# Altium PCB GD32F150C8_CoreBoard.PcbDoc
Units mil, origin at the board's own origin, x right, y up, seen from the top; angles counter-clockwise.
Board outline 825 x 2570 mil, 2 copper layers (Top Layer, Bottom Layer); 35 components, 56 nets, 181 pads, 67 vias.
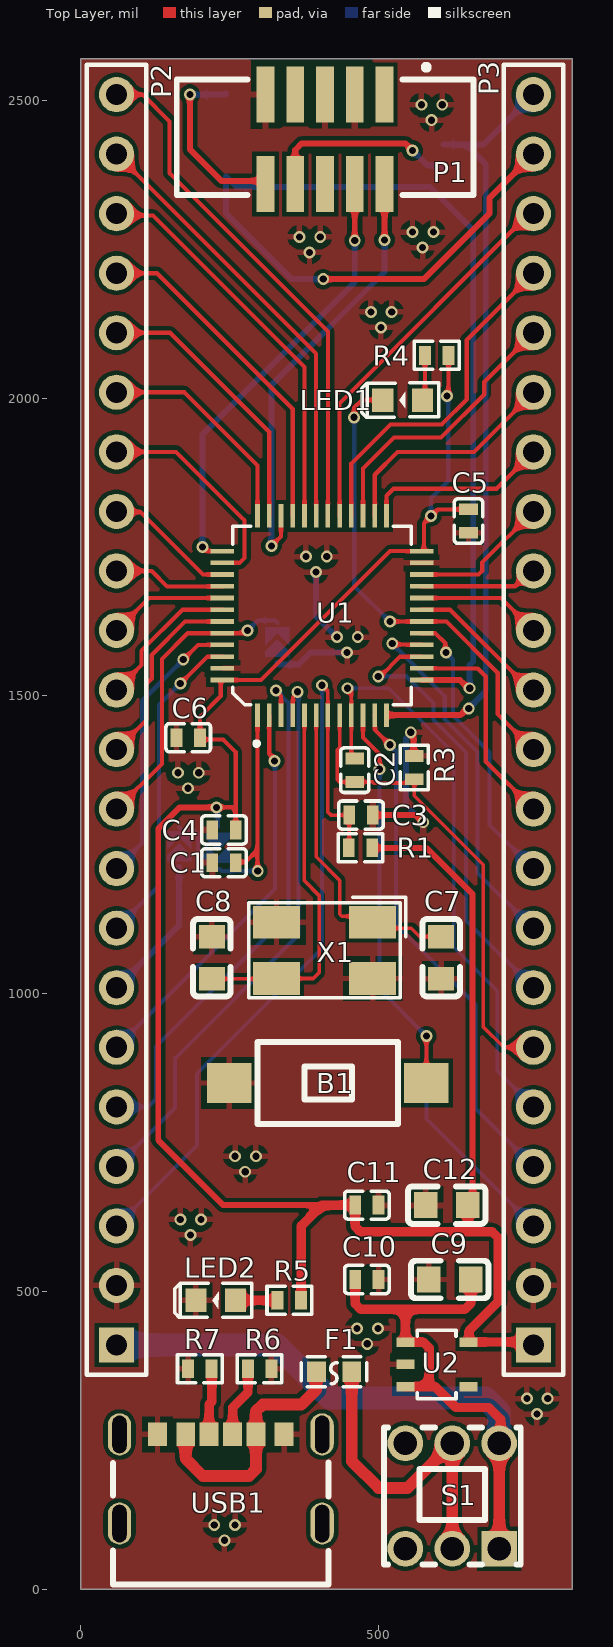
[diagram p0: Top Layer view]
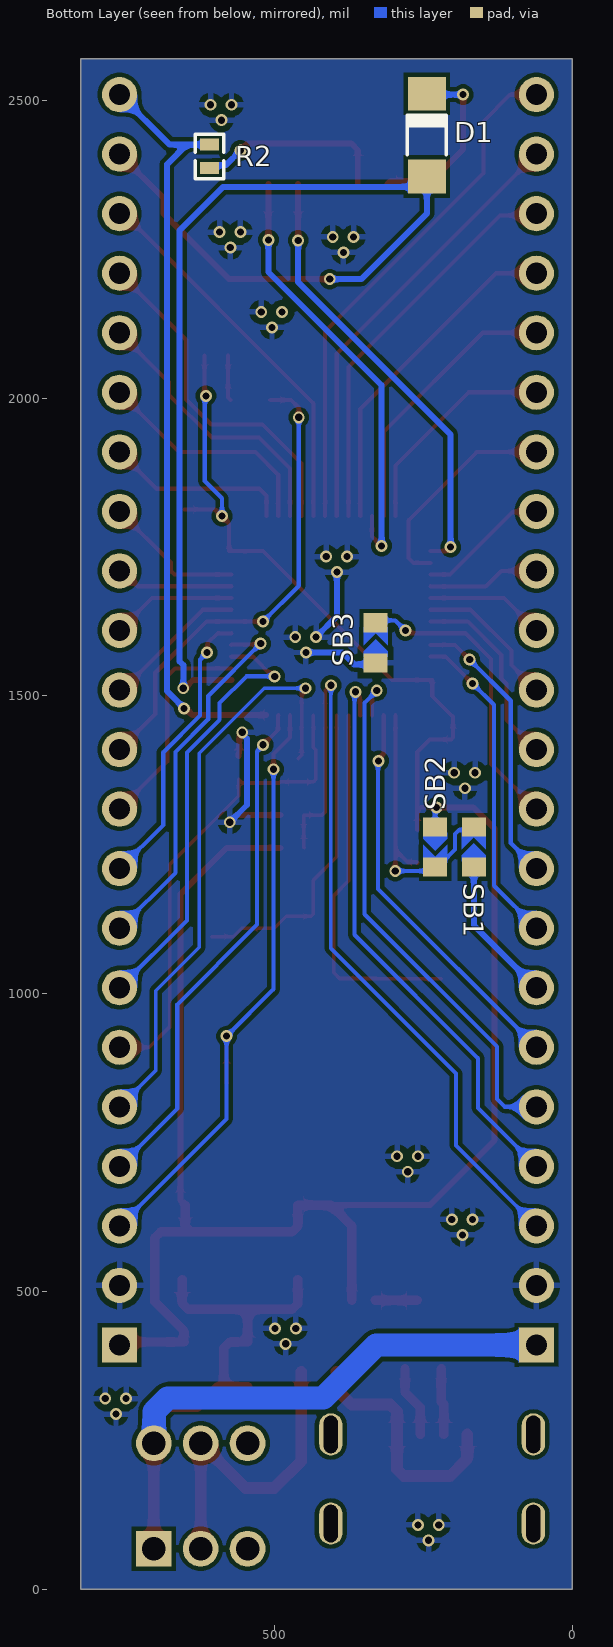
[diagram p1: Bottom Layer view, seen from below]
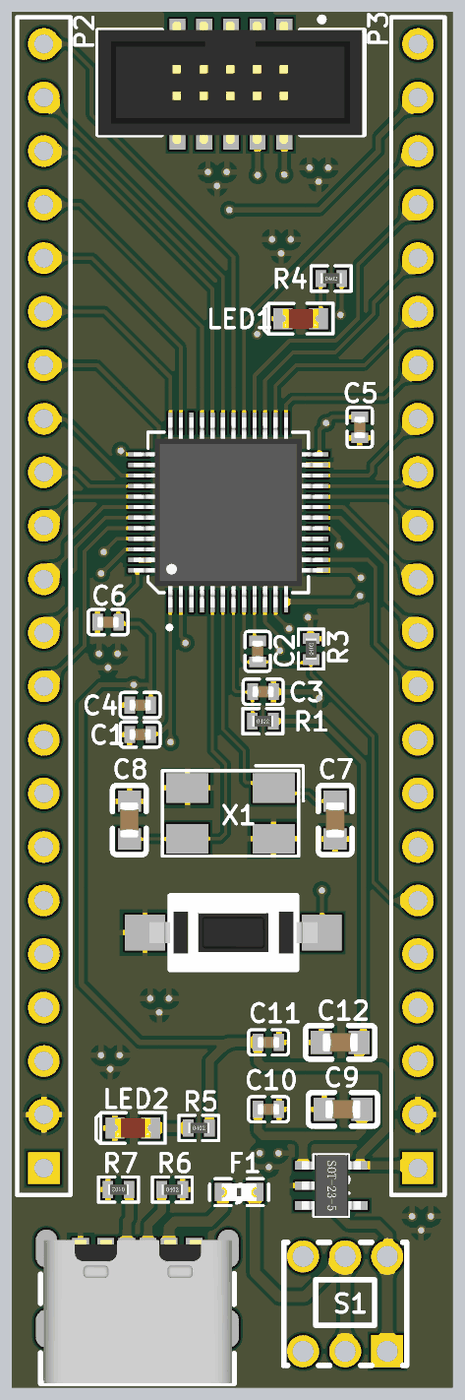
[diagram p2: 3D render of the assembled board from above, using the file's embedded part models]

## Layer stack, top to bottom
Top Solder: solder mask 0.4, Solder Resist, Dk 3.5
Top Layer: signal copper 1.4
Dielectric 1: dielectric 12.6, FR-4, Dk 4.8
Bottom Layer: signal copper 1.4
Bottom Solder: solder mask 0.4, Solder Resist, Dk 3.5

## Board outline
0,0 0,2570 825,2570 825,0

## Design rules (kind name [scope] priority, off if disabled: settings)
Clearance [All] p1: gap=7 ignorepadtopadclearanceinfootprint=FALSE except(0: Arc-Hole Track-Hole SMDPad-Hole THPad-Hole Via-Hole Fill-Hole Poly-Hole Region-Hole Text-Hole)
PolygonConnect [All] p1: connectstyle=Relief reliefconductorwidth=10 reliefentries=4 polygonreliefangle="90 Angle" airgapwidth=10
RoutingVias [All] p1: holewidth=28 width=50 viastyle="Through Hole" minholewidth=28 minwidth=50 maxholewidth=28 maxwidth=50
SolderMaskExpansion SolderMaskExpansion_1 [IsVia] p1: expansion=4 istentingtop=TRUE
SolderMaskExpansion [All] p2: expansion=4 istentingtop=FALSE
Width [All] p1: maxlimit=60 minlimit=6 preferedwidth=30
30 further rules are at their usual default settings.

## Components (designator, comment, footprint, x,y, rotation, side; value= is the part's Value field where it differs from the comment)
B1 "Button" SW-SMD_L6.0-W3.5-LS8.0 414.65,850 r0 top
C1 "Cap" C0402 240.32,1220 r0 top value=104
C2 "Cap" C0402 460,1375.31 r270 top value=104
C3 "Cap" C0402 470.31,1300 r180 top value=104
C4 "Cap" C0402 240.32,1275 r0 top value=104
C5 "Cap" C0402 651,1793.69 r90 top value=104
C6 "Cap" C0402 180.32,1430 r0 top value=104
C7 "Cap" C0603 605,1060.43 r90 top value=20p
C8 "Cap" C0603 220,1060.43 r90 top value=20p
C9 "Cap" C0603 619.57,520 r0 top value=10uF
C10 "Cap" C0402 480.31,520 r180 top value=104
C11 "Cap" C0402 480.31,645 r180 top value=104
C12 "Cap" C0603 614.57,645 r0 top value=10uF
D1 "D4148" SOD-80_L3.5-W1.5-RD 244,2442 r270 bottom
F1 "500mA" F0603 425.35,365 r0 top
LED1 "LED" LED0603_RED 540.46,1997 r180 top
LED2 "LED" LED0603_RED 226.53,485 r180 top
P1 "SWD" IDC-SMD-10P-1.27MM 410,2435 r180 top
P2 "HDR-M-2.54_1x22" HDR1X22-MALE 60,410 r90 top locked
P3 "HDR-M-2.54_1x22" HDR1X22-MALE 760,410 r90 top locked
R1 "Res" R0402 469.69,1245 r0 top value=0
R2 "Res" R0402 609,2406.31 r270 bottom value=300
R3 "Res" R0402 560,1379.69 r90 top value=0
R4 "Res" R0402 597.69,2072 r0 top value=1K
R5 "Res" R0402 350,485 r0 top value=1K
R6 "Res" R0402 300.32,370 r0 top value=510
R7 "Res" R0402 199.68,370 r180 top value=510
S1 "自锁按钮" SW-TH_5.8ZSGT 623.74,156.42 r0 top
SB1 "Circuit Breaker" JP2_SMD 165,1246.25 r270 bottom
SB2 "Circuit Breaker" JP2_SMD 230,1246.25 r90 bottom
SB3 "Circuit Breaker" JP2_SMD 330,1589.25 r270 bottom
U1 "GD32F130_150C8T6" "LQFP48 7X7" 405,1635 r0 top locked
U2 "ME6211C33M5G" SOT-23-5L 598.15,377.6 r0 top
USB1 "TYPE-C-6P" USB-C-SMD_6P 235,185 r0 top
X1 "8MHz" SMD-5032 409.29,1072.76 r180 top

## Footprints (in the part's own frame and the unit in brackets; to place one, negate y for a bottom-side part, rotate by r counter-clockwise, add the part's x,y. Pads: shape width x height; smd on the part's side, far side on the other; paste and mask are expansions set on the pad)
C0402 [mm]
  rect 0.5x0.8 smd: 1(-0.5,0) 2(0.5,0)
  silkscreen extent -0.95,-0.6 0.95,0.6, body extent -0.53,-0.28 0.52,0.27, height 0.55
C0603 [mm]
  rect 1x1.1 smd: 1(-0.9,0) 2(0.9,0)
  silkscreen extent -1.65,-0.8 1.65,0.8, body extent -0.85,-0.45 0.85,0.45, height 0.9
F0603 [mil]
  rect 31.75x34.02 smd: 1(-29.66,0) 2(29.65,0)
  silkscreen extent -55,-25 55,25, body extent -32,-17 32,17, height 21
HDR1X22-MALE [mm] "Connector; Header; 22 Position"
  rect 1.5x1.5 hole 0.9: 1(0,0)
  round 1.5 hole 0.9: 2(2.54,0) 3(5.08,0) 4(7.62,0) 5(10.16,0) 6(12.7,0) 7(15.24,0) 8(17.78,0) 9(20.32,0) 10(22.86,0) 11(25.4,0) 12(27.94,0) 13(30.48,0) 14(33.02,0) 15(35.56,0) 16(38.1,0) 17(40.64,0) 18(43.18,0) 19(45.72,0) 20(48.26,0) 21(50.8,0) 22(53.34,0)
  silkscreen extent -1.27,-1.27 54.61,1.27
IDC-SMD-10P-1.27MM [mm]
  rect 0.76x2.4 smd: 1(-2.54,-1.905) 2(-2.54,1.905) 3(-1.27,-1.905) 4(-1.27,1.905) 5(0,-1.905) 6(0,1.905) 7(1.27,-1.905) 8(1.27,1.905) 9(2.54,-1.905) 10(2.54,1.905)
  silkscreen extent -6.33,-3.18 6.32,2.39, body extent -6.25,-2.98 6.3,2.82, height 4.9
JP2_SMD [mil]
  rect 32x40 smd: 1(33.75,0) 2(-33.75,0)
  Top Layer region: -26.25,0 -16.25,0 3.75,-20 -26.25,-20
  Top Layer region: -26.25,0 -16.25,0 3.75,20 -26.25,20
  Top Layer region: 23.75,20 13.75,20 -6.25,0 13.75,-20 23.75,-20
LED0603_RED [mm]
  rect 0.9x1 smd: 1(-0.85,0) 2(0.85,0)
  silkscreen extent -1.54,-0.73 1.75,0.73, body extent -0.85,-0.45 0.85,0.45, height 0.9
"LQFP48 7X7" [mm]
  rect 0.2x1 smd: 1(-2.75,-4.25) 2(-2.25,-4.25) 3(-1.75,-4.25) 4(-1.25,-4.25) 5(-0.75,-4.25) 6(-0.25,-4.25) 7(0.25,-4.25) 8(0.75,-4.25) 9(1.25,-4.25) 10(1.75,-4.25) 11(2.25,-4.25) 12(2.75,-4.25) 25(2.75,4.25) 26(2.25,4.25) 27(1.75,4.25) 28(1.25,4.25) 29(0.75,4.25) 30(0.25,4.25) 31(-0.25,4.25) 32(-0.75,4.25) 33(-1.25,4.25) 34(-1.75,4.25) 35(-2.25,4.25) 36(-2.75,4.25)
  rect 1x0.2 smd: 13(4.25,-2.75) 14(4.25,-2.25) 15(4.25,-1.75) 16(4.25,-1.25) 17(4.25,-0.75) 18(4.25,-0.25) 19(4.25,0.25) 20(4.25,0.75) 21(4.25,1.25) 22(4.25,1.75) 23(4.25,2.25) 24(4.25,2.75) 37(-4.25,2.75) 38(-4.25,2.25) 39(-4.25,1.75) 40(-4.25,1.25) 41(-4.25,0.75) 42(-4.25,0.25) 43(-4.25,-0.25) 44(-4.25,-0.75) 45(-4.25,-1.25) 46(-4.25,-1.75) 47(-4.25,-2.25) 48(-4.25,-2.75)
  silkscreen extent -3.81,-5.52 3.81,3.81, body extent -4.5,-4.5 4.5,4.5, height 1.68
R0402 [mm]
  rect 0.5x0.8 smd: 1(-0.5,0) 2(0.5,0)
  silkscreen extent -0.95,-0.6 0.95,0.6, body extent -0.5,-0.25 0.5,0.25, height 0.35
SMD-5032 [mm] "晶振"
  rect 2x1.4 smd: 1(-2.05,-1.2) 2(2.05,-1.2) 3(2.05,1.2) 4(-2.05,1.2)
  silkscreen extent -3.46,-2.26 3.24,2.03
SOD-80_L3.5-W1.5-RD [mm]
  rect 1.44x1.62 smd: 1(-1.765,0) 2(1.765,0)
  silkscreen extent -0.84,-0.83 0.84,0.83, body extent -1.75,-0.75 1.75,0.75, height 1.5
SOT-23-5L [mil]
  rect 30x16 smd: 1(-53.15,37.4) 2(-53.15,0) 3(-53.15,-37.4) 4(53.15,-37.4) 5(53.15,37.4)
  silkscreen extent -33,-58 32,57, body extent -55,-57 55,57, height 47
SW-SMD_L6.0-W3.5-LS8.0 [mm]
  rect 1.9x1.7 smd: 1(-4.2,0) 2(4.2,0)
  silkscreen extent -3,-1.75 3,1.75, body extent -4,-1.75 4,1.75, height 4.3
SW-TH_5.8ZSGT [mm] "5.8x5.8 自锁按键开关"
  rect 1.524x1.524 hole 1: 1(2,-2.25)
  round 1.524 hole 1: 2(0,-2.25) 3(-2,-2.25) 4(2,2.25) 5(0,2.25) 6(-2,2.25)
  silkscreen extent -2.92,-2.92 2.92,2.92
USB-C-SMD_6P [mm]
  oval 1x1.8 hole 0.6 slot 1.6 at 90 deg: 1(4.32,1.9) 2(4.32,-1.9) 3(-4.32,-1.9) 4(-4.32,1.9)
  rect 0.8x1 smd: A5(-0.5,1.9) A9(1.5,1.9) A12(2.7,1.9) B5(0.5,1.9) B9(-1.5,1.9) B12(-2.7,1.9)
  silkscreen extent -4.6,-4.5 4.6,0.71, body extent -4.44,-4.5 4.5,2.3, height 3.26

## Part data
B1: "轻触按钮 - Switch", LatestRevisionDate=17-Jul-2002, LatestRevisionNote="Re-released for DXP Platform.", PackageDescription="Switch; 2 Leads", PackageReference=SPST-2, Published=24-Mar-1999, Publisher="Altium Limited"
C1 C2 C3 C4 C5 C6 C7 C8 C9 C10 C11 C12: "无极性电容", Publisher=信念D力量
D1: "4148二极管"
F1: library part "Fuse 1", "保险丝 - Fuse"
LED1 LED2: "发光二极管"
P1: library part IDC-2x5, "牛角座"
P2 P3: "排针，2.54MM"
R1 R2 R3 R4 R5 R6 R7: "美国电阻符号", LatestRevisionDate=29-May-2009, LatestRevisionNote="IPC-7351 Footprint Added.", PackageDescription="Chip Resistor", PackageReference=J1-0603, Published=8-Jun-2000, Publisher="Altium Limited"
S1: "自锁按钮开个"
SB1 SB2 SB3: "断路器 短路选择 - Circuit Breaker", Published=24-Mar-1999, Publisher="Altium Limited", Revision="July-2002: Re-released for DXP Platform.", Solder=NO
U1: "GD32 单片机"
U2: "3.3V LDO 线性稳压，带使能控制"
USB1: "Type-C USB，6P"
X1: library part XTAL-4, "4脚晶振"

## Via types
v1: diameter 20, hole 12, Top Layer to Bottom Layer, tented both sides, 67 vias

## Nets (pads, with @x,y where several pads share a name; then routed paths per layer and width w, separated by ;. In a path a pad name is that pad's centre, name@x,y a point inside that pad or via, vN(x,y) a via of type N, cw(c..) or ccw(c..) an arc to the next point about the centre after c; other vN are vias at no path point)
+5V: C9.2 C10.2 P2.1 S1.1 S1.4 U2.1 U2.3 | length 1589.7
  Top Layer w15.75: C10.2 460.63,479.22 469.85,470 545,470 ; U2.3 585,340.2 ; C9.2 655,480 645,470 545,470 ; S1.4 705,247.52 705,285 685,305 630,305 594.8,340.2 585,340.2 ; 545,470 U2.1 575,415 585,405 585,340.2
  Top Layer w19.68: S1.1 S1.4
  Bottom Layer w39.37: P2.1 329,410 418,321 679,321 702.06,297.94 702.06,245.42 S1.4
AGND: C2.2 P3.6 R3.1 U1.8 | length 806
  Top Layer w6: U1.8 434.53,1413.51 430.84,1409.82 430.84,1359.16 434.37,1355.63 490.19,1355.63 491.91,1353.9 553.9,1353.9 R3.1 560,1332.58 676,1216.58 676,944 710,910 P3.6
AVDD: C2.1 P3.5 U1.9 | length 995.6
  Top Layer w6: v1(448,1513) 454.21,1506.79 U1.9 454.21,1400.79 C2.1
  Bottom Layer w6: v1(448,1513) 517,1513 626,1404 626,1078 699,1005 699,871 P3.5
BOOT0: P2.10 SB3.2 U1.44 | length 506.1
  Top Layer w7: P2.10 136,1386 136,1562 179.47,1605.47 U1.44 275.47,1605.47 v1(280,1610)
  Bottom Layer w7: v1(280,1610) 297,1627 326,1627 SB3.2
GND: B1.1 C1.1 C3.1 C4.1 C5.1 C6.1 C7.1 C8.2 C9.1 C10.1 C11.1 C12.1 LED2.2 P1.3 P1.5 P1.9 P2.2 P3.2 R3.2 R6.2 R7.2 SB3.1 U1.23 U1.47 U2.2 USB1.A12 USB1.B12 X1.2 X1.4 | length 548.2
  Top Layer w10: C3.1 563,1300 v1(575,1288) ; v1(554,1439) 554,1436.29 559,1431.29 559,1404.21 560,1403.21 R3.2
  Bottom Layer w10: SB3.1 332.5,1553 366,1553 386,1573 v1(447,1573) ; v1(395,1708) 395,1634 v1(430,1599) ; v1(554,1439) 554,1436.29 546,1428.29 546,1317 v1(575,1288)
  other v1: 241,82 224,108 259,108 766,294 749,320 784,320 481,412 464,438 499,438 184,595 167,621 202,621 276,701 259,727 294,727 180,1345 163,1371 198,1371 465,1599 378,1734 413,1734 504,2119 487,2145 522,2145 384,2245 574,2253 367,2271 402,2271 557,2279 592,2279 589,2467 572,2493 607,2493
NetF1_2: F1.2 S1.2 S1.5 | length 545.6
  Top Layer w19.68: F1.2 455,215 500,170 548.74,170 S1.5 S1.2
NetLED1_1: LED1.1 R4.1 | length 76.7
  Top Layer w7: LED1.1 577.99,2001.07 R4.1
NetLED2_1: LED2.1 R5.1 | length 70.3
  Top Layer w15.75: LED2.1 R5.1
NetR6_1: R6.1 USB1.B5 | length 120.9
  Top Layer w15.75: USB1.B5 255,260.12 255,305 280.63,330.63 R6.1
NetR7_1: R7.1 USB1.A5 | length 112.4
  Top Layer w15.75: USB1.A5 215.31,310.32 220,315 220,369.37 R7.1
NRST: C3.2 P2.3 R1.1 U1.7 | length 1361
  Top Layer w6: v1(405,1518) 414.84,1508.16 U1.7 414.84,1305.16 420,1300 C3.2 450.63,1245.63 R1.1
  Bottom Layer w6: P2.3 195,745 195,866 405,1076 v1(405,1518)
OSC_OUT: C7.2 U1.6 X1.1 | length 536.3
  Top Layer w6: U1.6 395.16,1229.84 435,1190 435,1133.51 438.51,1130 480,1130 X1.1 500,1110 555,1110 569.13,1095.87 C7.2
PA0: B1.2 P3.3 U1.10 | length 1054.6
  Top Layer w7: U1.10 473.9,1430.1 501.44,1402.56 v1(501.44,1376.9) ; B1.2 580.27,850.27 v1(580.27,928.73)
  Bottom Layer w7: v1(501.44,1376.9) 501.44,1007.56 v1@580,929 ; v1(580.27,928.73) 580.27,789.73 P3.3
PA1: P3.4 U1.11 | length 868
  Top Layer w7: U1.11 494.02,1467.24 494.02,1442.98 v1(519,1418)
  Bottom Layer w7: v1(519,1418) 519,1417 529,1407 529,1116 663,982 663,807 P3.4
PA2: P3.22 R2.1 U1.12 | length 1300
  Top Layer w10: U1.12@514.33,1468 637.79,1468 648.79,1479 v1(651.5,1479)
  Bottom Layer w10: R2.1 647,2426 ; v1(651.5,1479) 651.5,1479.5 680,1508 680,2393 647,2426 ; P3.22 676,2426 647,2426
PA3: D1.2 P3.21 U1.13 | length 2036.6
  Top Layer w10: v1(407,2200) 576,2200 686,2310 686,2336 P3.21 ; U1.13 636.56,1526.73 650.29,1513 v1(653,1513)
  Bottom Layer w10: v1(407,2200) 354,2200 244,2310 D1.2 261.51,2355 586,2355 659,2282 659,1558 653,1552 v1(653,1513)
PA4: P3.10 U1.14 | length 369.4
  Top Layer w7: U1.14 666.58,1546.42 680,1533 680,1390 P3.10
PA5: P3.7 U1.15 | length 745.3
  Top Layer w7: v1(499.5,1533) 503,1533 536,1566 572.22,1566 U1.15
  Bottom Layer w7: v1(499.5,1533) 547,1533 592,1488 592,1460 647,1405 647,1123 P3.7
PA6: P3.8 U1.16 | length 627
  Top Layer w7: v1(523,1588) 524.78,1586.22 571.89,1586.22 U1.16
  Bottom Layer w7: v1(523,1588) 611,1500 611,1461 666,1406 666,1203 759,1110 P3.8
PA7: P3.9 U1.17 | length 486.7
  Top Layer w7: U1.17 572.76,1605.04 595.79,1605.04 612.04,1588.78 612.04,1573.96 v1(613,1573)
  Bottom Layer w7: v1(613,1573) 625,1561 625,1467 686.5,1405.5 686.5,1283.5 P3.9
PA8: P3.20 U1.29 | length 646.6
  Top Layer w7: U1.29 434.53,1991.53 753,2310 P3.20
PA9: P2.22 U1.30 | length 880.4
  Top Layer w7: P2.22 104,2510 149,2465 149,2378 414.84,2112.16 U1.30
PA10: P2.21 U1.31 | length 746.5
  Top Layer w7: P2.21 395.16,2074.84 U1.31
PA11: P2.20 U1.32 | length 672.3
  Top Layer w7: P2.20 63,2307 121,2307 375.47,2052.53 U1.32
PA12: P2.19 U1.33 | length 570
  Top Layer w7: P2.19 128,2210 355.79,1982.21 U1.33
PA13: P1.2 U1.34 | length 743.7
  Top Layer w7: v1(320,1752) 336.1,1768.1 U1.34
  Top Layer w10: v1(510,2266) P1.2
  Bottom Layer w10: v1(320,1752) 320,2022 510,2212 v1(510,2266)
PA14: P1.4 U1.37 | length 752.5
  Top Layer w7: v1(204,1750) 210.73,1743.27 U1.37
  Top Layer w10: v1(460,2265) P1.4
  Bottom Layer w10: v1(204,1750) 204,1939 460,2195 v1(460,2265)
PA15: P2.16 U1.38 | length 366.4
  Top Layer w7: P2.16 160,1910 275,1795 275,1732 266.58,1723.58 U1.38
PB0: LED1.2 P3.11 U1.18 | length 807.8
  Top Layer w7: v1(459,1968) 459,1984 472,1997 LED1.2 ; v1(519,1625) 519.08,1625.08 572.24,1625.08 U1.18 613.84,1625.16 700,1539 700,1470 P3.11
  Bottom Layer w7: v1(459,1968) 459,1685 v1(519,1625)
PB1: P3.12 U1.19 | length 243.5
  Top Layer w7: U1.19 620.16,1644.84 755,1510 P3.12
PB2: P3.13 U1.20 | length 210.3
  Top Layer w7: U1.20 705.47,1664.53 P3.13
PB3: P2.15 U1.39 | length 221.6
  Top Layer w7: P2.15 61.03,1808.97 100.03,1808.97 205.1,1703.9 U1.39
PB4: P2.14 U1.40 | length 188.5
  Top Layer w7: P2.14 119,1710 145,1684 237.46,1684 U1.40
PB5: P2.13 U1.41 | length 200.3
  Top Layer w7: P2.13 114.53,1664.53 U1.41
PB6: P2.12 U1.42 | length 247.6
  Top Layer w7: P2.12 102,1552 102,1576.08 170.76,1644.84 U1.42
PB7: P2.11 U1.43 | length 325.4
  Top Layer w7: P2.11 110,1460 110,1520.51 119,1529.51 119,1569.04 175.12,1625.16 U1.43
PB8: P2.9 U1.45 | length 473.3
  Top Layer w7: v1(172,1561) 196.79,1585.79 U1.45
  Bottom Layer w7: P2.9 103.03,1253.03 103.03,1492.03 v1(172,1561)
PB9: P2.8 U1.46 | length 544.7
  Top Layer w7: v1(167,1521) 167.5,1521 212.6,1566.1 U1.46
  Bottom Layer w7: P2.8 131.25,1181.25 131.25,1485.25 v1(167,1521)
PB10: P3.14 U1.21 | length 198.4
  Top Layer w7: U1.21 729.18,1684.21 754.97,1710 P3.14
PB11: P3.15 U1.22 | length 239.8
  Top Layer w7: U1.22 667.9,1703.9 674,1710 674,1724 P3.15
PB12: P3.16 U1.25 | length 311.2
  Top Layer w7: U1.25 513.27,1836.27 525,1848 698,1848 P3.16
PB13: P3.17 U1.26 | length 393
  Top Layer w7: U1.26 493.58,1871.58 532,1910 660,1910 P3.17
PB14: P3.18 U1.27 | length 472.5
  Top Layer w7: U1.27 473.9,1881.9 526,1934 605,1934 677.52,2006.52 677.52,2027.52 P3.18
PB15: P3.19 U1.28 | length 584.7
  Top Layer w7: U1.28 454.21,1890.21 520,1956 606,1956 648,1998 648,2098 P3.19
PC13: P2.6 U1.2 | length 671.8
  Top Layer w7: U1.2 316.42,1403.1 325,1394.52 v1(325,1391)
  Bottom Layer w7: P2.6 326,1176 326,1390 v1(325,1391)
PC14: P2.5 U1.3 | length 902.7
  Top Layer w7: v1(328,1509) 328,1507.65 336.1,1499.54 U1.3
  Bottom Layer w7: P2.5 113,810 126,823 126,911 348.5,1133.5 348.5,1488.5 v1(328,1509)
PC15: P2.4 U1.4 | length 966.9
  Top Layer w7: U1.4 356.22,1468.11 356.22,1497.86 364,1505.65 v1(364,1507)
  Bottom Layer w7: P2.4 158,808 158,891.5 365.5,1099 365.5,1505.5 v1(364,1507)
PF6: P2.18 U1.35 | length 466.6
  Top Layer w7: P2.18 150,2110 316.42,1943.58 U1.35
PF7: P2.17 U1.36 | length 372.5
  Top Layer w7: P2.17 174,2010 296.73,1887.27 U1.36
RX: D1.1 P1.10 | length 304.6
  Top Layer w10: v1(183,2510) 183,2418 236,2365 305,2365 P1.10
  Bottom Layer w10: v1(183,2510) 242.51,2510 D1.1
SOC_IN: C8.1 U1.5 X1.3 | length 627
  Top Layer w6: C8.1 328.07,1025 X1.3 390.51,1025.51 400,1035 400,1165 375.47,1189.53 U1.5
TX: P1.8 R2.2 | length 327.7
  Top Layer w10: P1.8 360,2417 371,2428 545,2428 v1(557,2416)
  Bottom Layer w10: v1(557,2416) 581.52,2391.48 604.15,2391.48 R2.2
VBAT: C1.2 SB1.2 SB2.2 U1.1 | length 485.6
  Top Layer w7: C1.2 261.24,1221.24 276.24,1221.24 296.73,1241.73 ; U1.1 296.73,1241.73 ; v1(297,1206) 296.73,1206.27 296.73,1241.73
  Bottom Layer w7: SB1.2 170,1275 189.9,1275 196.5,1268.4 196.5,1242 229.25,1209.25 233.25,1209.25 236.5,1206 v1(297,1206)
VBAT_OUT: P2.7 SB1.1 | length 246
  Bottom Layer w10: P2.7 165,1115 SB1.1
VBUS: F1.1 USB1.A9 USB1.B9 | length 419
  Top Layer w19.68: USB1.B9 175.94,219.06 205,190 282.52,190 294.06,201.53 USB1.A9 294.06,298.47 305.59,310 370,310 395,335 395,364.31 F1.1
VDD: C4.2 C5.2 C6.2 C11.2 C12.2 P3.1 R1.2 R4.2 R5.2 SB2.1 U1.24 U1.48 U2.5 | length 3777.8
  Top Layer w7: v1(228,1313) 254,1313 260,1307 ; C4.2 260,1307 ; v1(615,2004) 617.37,2006.37 R4.2 ; C5.2 599.37,1813.37 v1(588,1802) 576,1790 576,1743.7 575.56,1743.27 U1.24 519.27,1743.27 302.73,1526.73 U1.48 235.44,1526.73 235,1526.3 235,1500 200,1465 C6.2 203,1427 239,1427 260,1406 260,1307
  Top Layer w10: v1(228,1313) 166,1313 130,1277 130,754 239,645 405,645 ; R1.2 580,1245 658,1167 658,653 C12.2
  Top Layer w15.75: R5.2 370,485.32 370,610 405,645 C11.2 460.63,609.22 469.85,600 640,600 ; C12.2 650,610 640,600 ; U2.5 U2.5@651.87,415 ; P3.1 755,415 U2.5@651.87,415 ; 640,600 691,600 701,590 701,483 652,434 652,415.13 U2.5@651.87,415
  Bottom Layer w7: v1(228,1313) 228,1311.65 230,1309.65 SB2.1 ; v1(588,1802) 588,1832 617,1861 617,2002 v1(615,2004)
pads on no net: P1.1 P1.6 P1.7 S1.3 S1.6 U2.4 USB1.1 USB1.2 USB1.3 USB1.4

## Polygon pours and split planes (outlines as drawn)
GND on Top Layer "GND_L01_P000" (solid, pour order 0): 0,2570 0,0 825,0 825,2570
GND on Bottom Layer "GND_L02_P001" (solid, pour order 1): 0,2570 0,0 825,0 825,2570

## Silkscreen, mask and mechanical layers (free items; w line width, h text height)
Mechanical 1:
  the board outline again, w10